# Altium PCB isolated TTL_to_485.PcbDoc
Units mm, origin at the board's own origin, x right, y up, seen from the top; angles counter-clockwise.
Board outline 50 x 30 mm, 2 copper layers (Top Layer, Bottom Layer); 21 components, 16 nets, 66 pads, 0 vias.
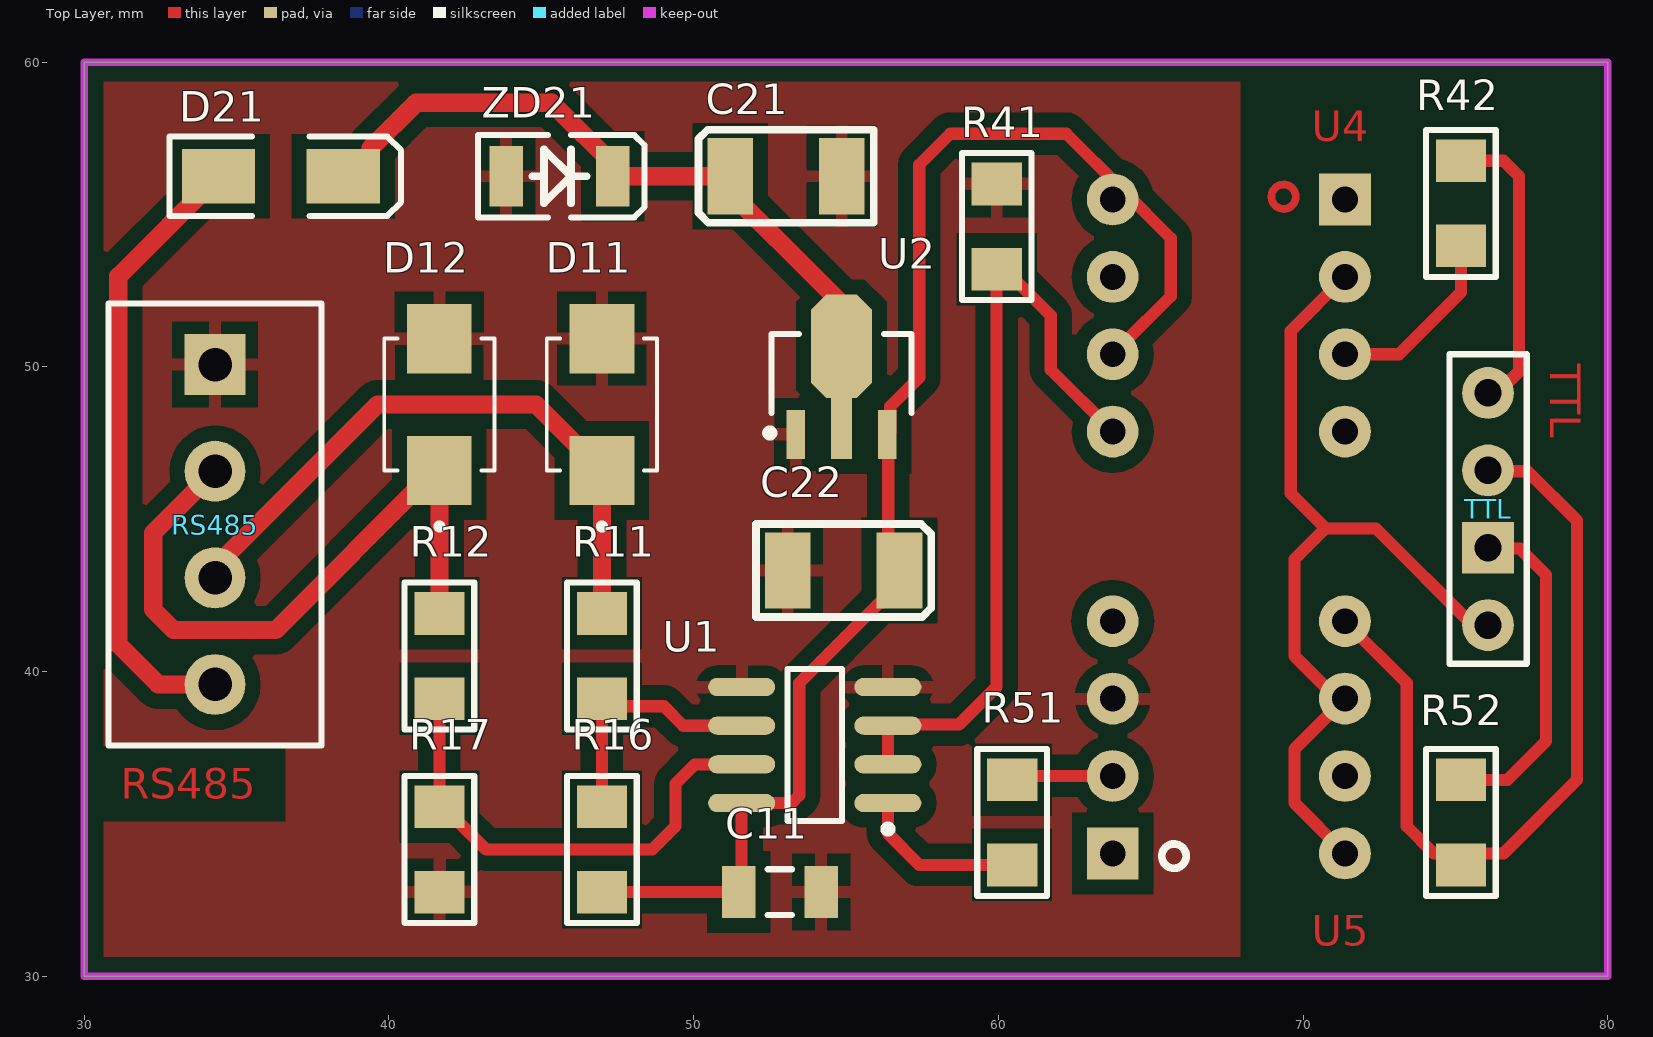
[diagram p0: Top Layer view]
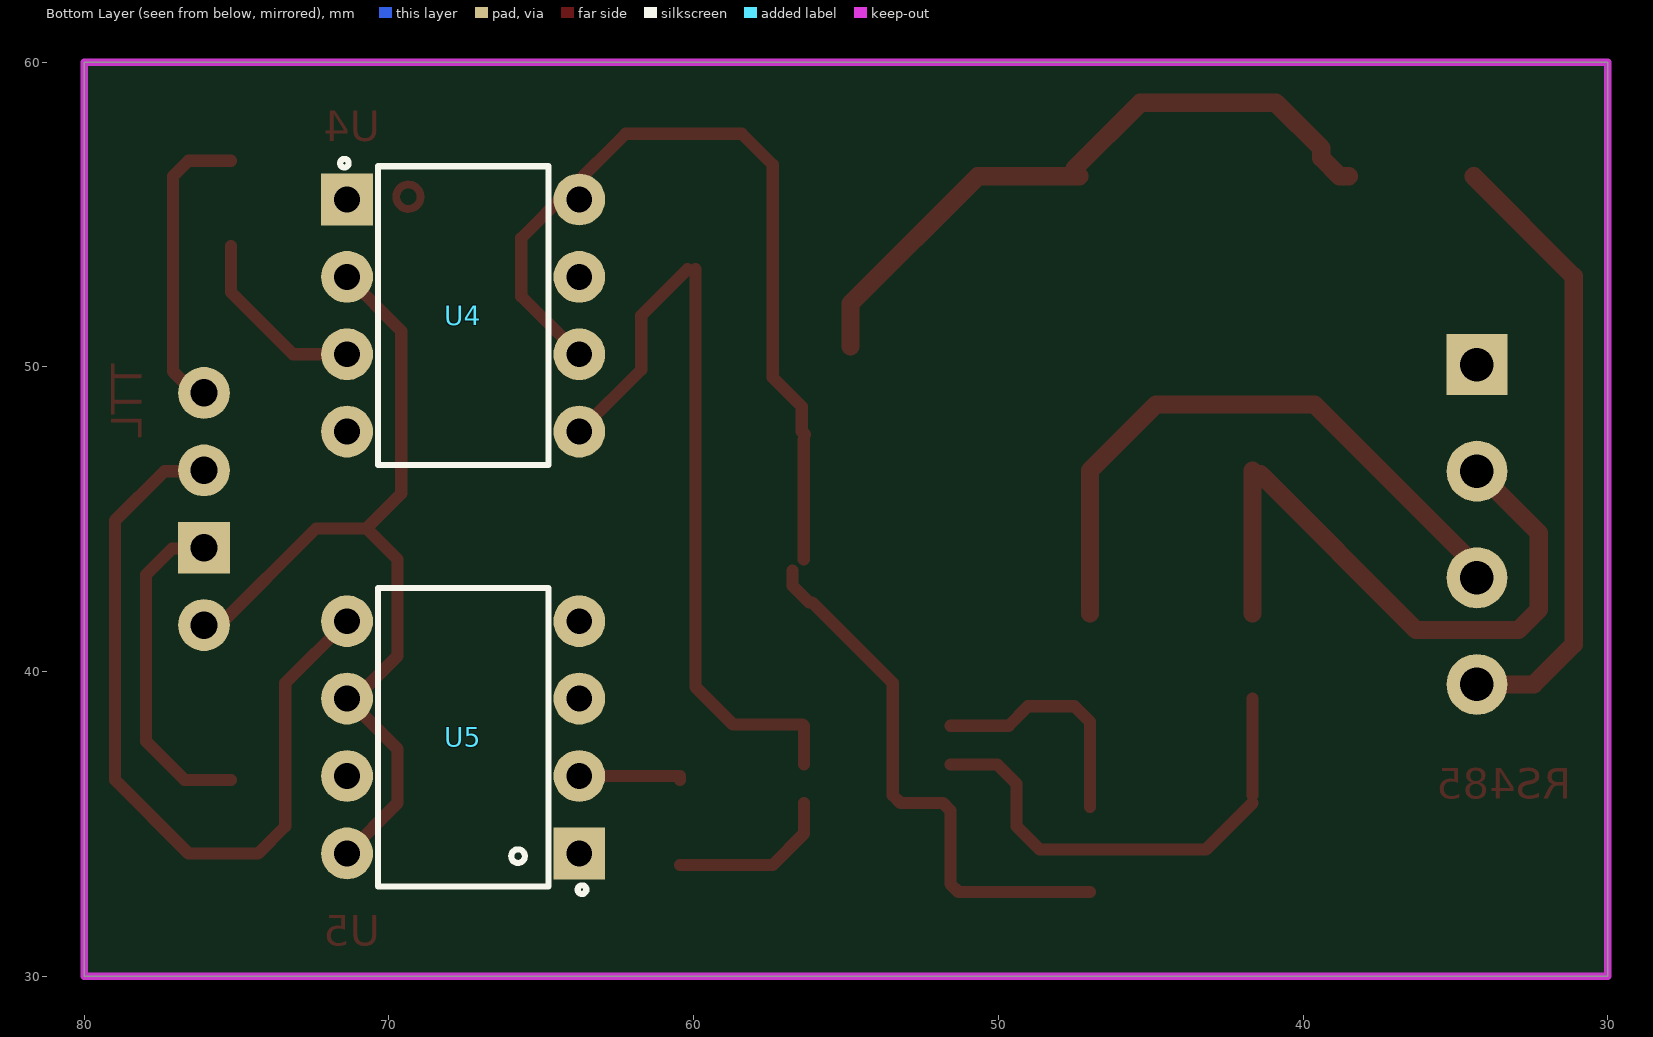
[diagram p1: Bottom Layer view, seen from below]
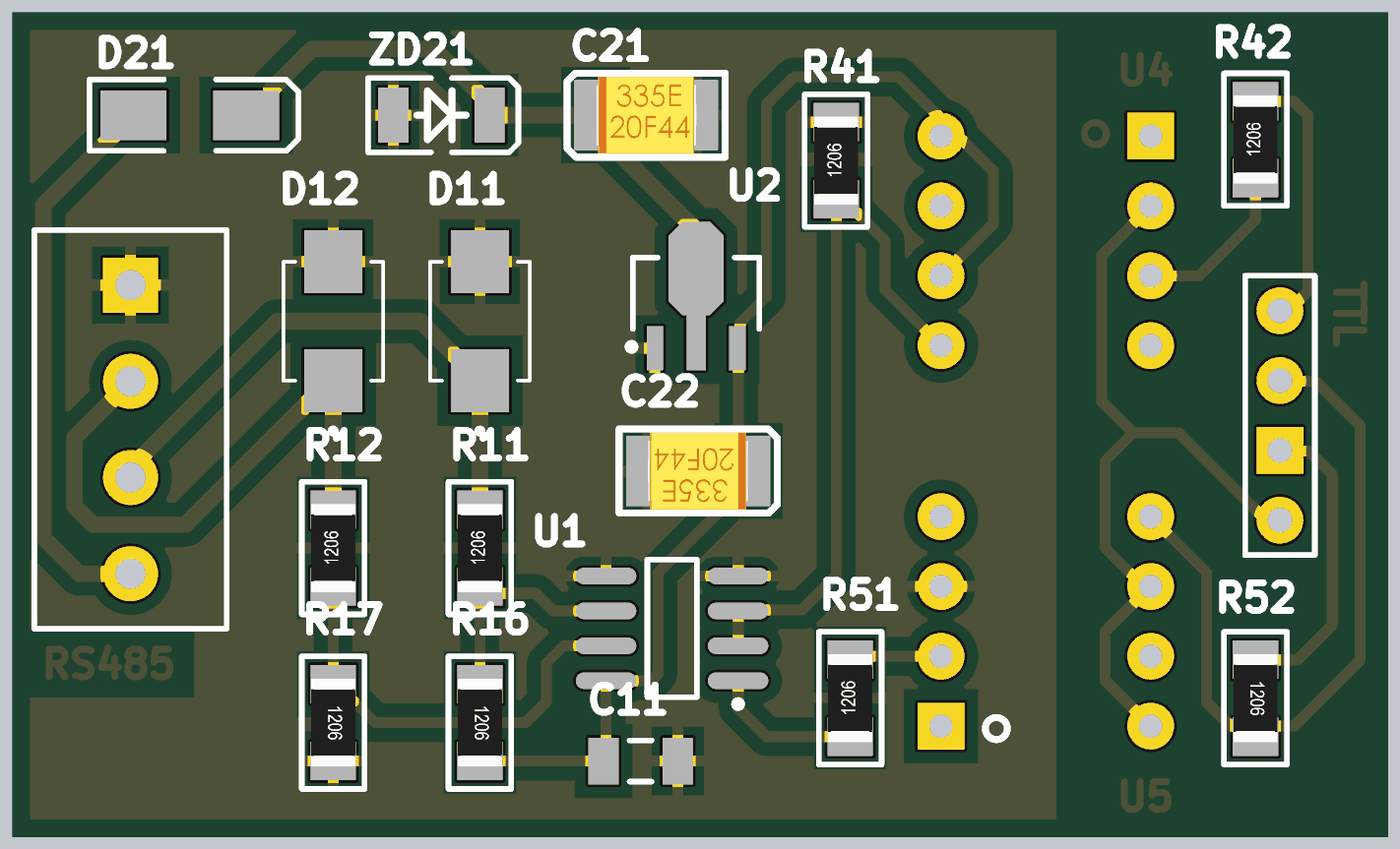
[diagram p2: 3D render of the assembled board from above, using the file's embedded part models]

## Layer stack, top to bottom
Top Solder: solder mask 0.0102, Solder Resist, Dk 3.5
Top Layer: signal copper 0.0356
Dielectric 1: dielectric 0.32, FR-4, Dk 4.8
Bottom Layer: signal copper 0.0356
Bottom Solder: solder mask 0.0102, Solder Resist, Dk 3.5

## Board outline
30,30 80,30 80,60 30,60

## Design rules (kind name [scope] priority, off if disabled: settings)
Clearance [All] p1: gap=0.4 ignorepadtopadclearanceinfootprint=FALSE
PolygonConnect [All] p1: connectstyle=Relief reliefconductorwidth=0.4 reliefentries=4 polygonreliefangle="90 Angle" airgapwidth=0.4
RoutingVias [All] p1: holewidth=0.711 width=1.27 viastyle="Through Hole" minholewidth=0.711 minwidth=1.27 maxholewidth=0.711 maxwidth=1.27
SolderMaskExpansion [All] p1: expansion=0.102 istentingtop=FALSE
Width [All] p1: maxlimit=1 minlimit=0.254 preferedwidth=0.254 minimp=50.000000 maximp=50.000000 favimp=50.000000
30 further rules are at their usual default settings.

## Components (designator, comment, footprint, x,y, rotation, side; value= is the part's Value field where it differs from the comment)
C11 "Cap" C1206 52.832,32.766 r0 top value=100nF
C21 "106E" "Tantalium CASE B" 53.033,56.261 r0 top value=10uF
C22 "106C" "Tantalium CASE B" 54.924,43.318 r180 top value=10uF
D11 "SMBJ12A" DIOM4336X265N 46.99,48.768 r90 top
D12 "SMBJ12A" DIOM4336X265N 41.656,48.768 r90 top
D21 "1N4007" SMA 36.449,56.261 r0 top
R11 "Res" "1206 Resistor" 46.99,40.513 r90 top value=10
R12 "Res" "1206 Resistor" 41.656,40.513 r90 top value=10
R16 "Res" "1206 Resistor" 46.99,34.163 r270 top value=10K
R17 "Res" "1206 Resistor" 41.656,34.163 r270 top value=10K
R41 "Res" "1206 Resistor" 59.944,54.61 r90 top value=1K
R42 "Res" "1206 Resistor" 75.184,55.372 r90 top value=470
R51 "Res" "1206 Resistor" 60.452,35.052 r90 top value=470
R52 "Res" "1206 Resistor" 75.184,35.052 r270 top value=1K
RS485 "Header 4" HDR1X4#1 34.29,41.5 r90 top
TTL "Header 4" HDR1X4#2 76.073,41.529 r90 top
U1 "MAX485CSA" NSO8_N 53.975,37.592 r180 top
U2 "HT7550" SOT-89_M 54.85,49.784 r90 top
U4 "6N136M" DIP762W50P254L977H451Q8#1 67.564,51.689 r180 bottom
U5 "6N136M" DIP762W50P254L977H451Q8#2 67.564,37.846 r0 bottom
ZD21 "Diode Zener" "Mini MELF" 45.593,56.261 r0 top value=18v

## Footprints (in the part's own frame and the unit in brackets; to place one, negate y for a bottom-side part, rotate by r counter-clockwise, add the part's x,y. Pads: shape width x height; smd on the part's side, far side on the other; paste and mask are expansions set on the pad)
"1206 Resistor" [mil]
  rect 55x65 smd: 1(-55,0) 2(55,0)
  silkscreen extent -95,-45 95,45, body extent -63,-31 63,31, height 24
C1206 [mm] "Chip Capacitor, Body 3.2x1.6mm, IPC High Density"
  rect 1.1x1.7 smd: 1(-1.35,0) 2(1.35,0)
  silkscreen extent -0.4,-0.75 0.4,0.75, body extent -1.7,-0.9 1.7,0.9, height 1.3
DIOM4336X265N [mm]
  rect 2.28x2.12 smd: A(2.165,0) C(-2.165,0)
  silkscreen extent -4.1,-1.81 2.16,1.81
DIP762W50P254L977H451Q8#1 [mm]
  rect 1.7x1.7 hole 0.85: 1(-3.81,3.81)
  round 1.7 hole 0.85: 2(-3.81,1.27) 3(-3.81,-1.27) 4(-3.81,-3.81) 5(3.81,-3.81) 6(3.81,-1.27) 7(3.81,1.27) 8(3.81,3.81)
  Bottom Layer circle w0.254: c-1.8,3.9 r0.4
  silkscreen extent -4.04,-4.9 2.8,5.14
DIP762W50P254L977H451Q8#2 [mm]
  rect 1.7x1.7 hole 0.85: 1(-3.81,3.81)
  round 1.7 hole 0.85: 2(-3.81,1.27) 3(-3.81,-1.27) 4(-3.81,-3.81) 5(3.81,-3.81) 6(3.81,-1.27) 7(3.81,1.27) 8(3.81,3.81)
  silkscreen extent -4.04,-4.9 2.8,5.14
HDR1X4#1 [mm] "Connector; Header; 4 Position"
  round 2 hole 1.1: 1(-1.92,0) 2(1.58,0) 3(5.08,0)
  rect 2x2 hole 1.1: 4(8.58,0)
  silkscreen extent -3.92,-3.5 10.58,3.5
HDR1X4#2 [mm] "Connector; Header; 4 Position"
  round 1.7 hole 0.9: 1(0,0) 3(5.08,0) 4(7.62,0)
  rect 1.7x1.7 hole 0.9: 2(2.54,0)
  silkscreen extent -1.27,-1.27 8.89,1.27
"Mini MELF" [mm] "Mini MELF; 3.5mm*1.45mm"
  rect 1.1x2 smd: 1(-1.75,0) 2(1.75,0)
  silkscreen extent -2.67,-1.35 2.79,1.35
NSO8_N [mm] "SOIC, 8-Leads, Body 4.9x3.9mm, Pitch 1.27mm, IPC Medium Density"
  oval 2.2x0.6 smd: 1(-2.4,1.905) 2(-2.4,0.635) 3(-2.4,-0.635) 4(-2.4,-1.905) 5(2.4,-1.905) 6(2.4,-0.635) 7(2.4,0.635) 8(2.4,1.905)
  silkscreen extent -2.53,-2.5 0.9,2.88, body extent -2,-2.5 2,2.5, height 1.75
SMA [mm] "DO-214-AC/SMA; 2 C-Bend Leads; Body 5 x 2.7 mm, inc. leads (LxW)"
  rect 2.4x1.8 smd: 1(-2.05,0) 2(2.05,0)
  silkscreen extent -3.65,-1.3 3.95,1.3
SOT-89_M [mm] "SOT89, 3-Leads, Body 4.5x2.4 mm, Pitch 1.5mm, Lead Span 4.1mm, IPC Low Density"
  rect 1.6x0.6 smd: 1(-2,1.5) 3(-2,-1.5)
  rect 2x0.7 smd: 2(-1.8,0)
  oct 3.4x2 smd: 2(0.9,0)
  silkscreen extent -2.07,-2.3 1.3,2.47, body extent -1.3,-2.3 1.3,2.3, height 1.6
"Tantalium CASE B" [mm]
  rect 1.5x2.5 smd paste+0.038 mask+0.038: 1(-1.831,0) 2(1.832,0)
  silkscreen extent -2.88,-1.53 2.88,1.53, body extent -1.83,-1.4 1.83,1.4, height 1.95

## Part data
C11: "Capacitor"
C21 C22: library part "Cap Pol2", "Polarized Capacitor Tantalium"
D11 D12: "15.6V Clamp 17.5A Ipp Tvs Diode Surface Mount DO-214AA (SMB)", Package="SMB-2 Fairchild Semiconductor", Availability="In Stock", Check_prices=https://www.snapeda.com/parts/SMBJ12A/Onsemi/view-part/?ref=eda, MF="ON Semiconductor", MP=SMBJ12A, Price=None, Purchase-URL=https://pricing.snapeda.com/search/part/SMBJ12A/?ref=eda, SnapEDA_Link=https://www.snapeda.com/parts/SMBJ12A/Onsemi/view-part/?ref=snap
D21: library part Diode, "Default Diode", Code_JEDEC=DO-214-AB, LatestRevisionDate=17-Jul-2002, LatestRevisionNote="Re-released for DXP Platform.", PackageDescription="DO-214-AB/SMC; 2 C-Bend Leads; Body 7.9 x 5.9 mm, inc. leads (LxW)", PackageReference=SMC, PackageVersion=Sep-1996, Published=8-Jun-2000, Publisher="Altium Limited"
R11 R12 R16 R17 R41 R42 R51 R52: "Resistor", PackageDescription="Chip Resistor"
RS485 TTL: "Header, 4-Pin", LatestRevisionDate=17-Jul-2002, LatestRevisionNote="Re-released for DXP Platform.", Publisher="Altium Limited"
U1: "Low-Power, Slew-Rate-Limited RS-485/RS-422 Transceiver", Code_IPC=SOIC127P600-8, Code_JEDEC=MS-012-AA, ComponentLink1Description="Manufacturer Link", ComponentLink1URL=http://www.maxim-ic.com/, ComponentLink2Description=Datasheet, ComponentLink2URL=http://pdfserv.maxim-ic.com/en/ds/MAX1487-MAX491.pdf, DatasheetVersion=Feb-1996, LatestRevisionDate=13-Apr-2006, LatestRevisionNote="IPC-7351 Footprint Added.", PackageDescription="8-Pin Small Outline Integrated Circuit 1.27 mm Pitch", PackageReference=NSO8, Published=16-Jan-2001, Publisher="Altium Limited"
U2: library part L78L33ABUTR, "Positive Voltage Regulator, 3.3V, 4-Pin SOT-89, Tape and Reel", ComponentLink1Description="Manufacturer URL", ComponentLink1URL=http://www.st.com, ComponentLink2Description=Datasheet, ComponentLink2URL=http://www.st.com/internet/com/TECHNICAL_RESOURCES/TECHNICAL_LITERATURE/DATASHEET/CD00000446.pdf, DatasheetVersion=Feb-2011, PackageDescription="3-Pin SOT-89 Package 1.5 mm Pitch, 4.1 mm Lead Span", PackageReference=SOT-89, PackageVersion=2011, PartNumber=L78L33ABUTR
U4 U5: "High Speed Optocoupler, 1 MBd, Photodiode with Transistor Output", Package=None, Availability=Unavailable, MP=6N136M, Price=None
ZD21: "Zener Diode", PackageDescription="Zener Diode"

## Nets (pads, with @x,y where several pads share a name; then routed paths per layer and width w, separated by ;. In a path a pad name is that pad's centre, name@x,y a point inside that pad or via, vN(x,y) a via of type N, cw(c..) or ccw(c..) an arc to the next point about the centre after c; other vN are vias at no path point)
A: D11.C R11.2 RS485.2 | length 20.9
  Top Layer w0.6: RS485.2 34.29,43.434 39.624,48.768 44.825,48.768 D11.C R11.2
B: D12.C R12.2 RS485.3 | length 21.6
  Top Layer w0.6: RS485.3 32.258,44.548 32.258,42.037 32.93,41.365 36.285,41.365 D12.C@41.402,46.482 ; R12.2 41.656,46.228 D12.C
GND: C11.2 C21.2 C22.2 D11.A D12.A R17.2 R41.2 RS485.4 U1.4 U1.5 U2.1 U5.3 ZD21.1
GND_TTL: R52.1 TTL.2 | length 10.7
  Top Layer w0.4: R52.1 76.708,36.449 77.978,37.719 77.978,43.18 77.118,44.04 TTL.2@76.454,44.04
NetC21_1: C21.1 D21.2 U2.2 ZD21.2 | length 21.7
  Top Layer w0.6: D21.2 38.799,56.261 39.399,56.861 39.399,57.179 40.894,58.674 45.339,58.674 ZD21.2@47.498,56.515 ; ZD21.2 50.673,56.261 54.85,52.084 U2.2@54.85,50.684
NetR11_1: R11.1 R16.1 U1.6 | length 7.9
  Top Layer w0.4: R16.1 46.99,38.354 47.498,38.862 49.022,38.862 49.657,38.227 U1.6
NetR12_1: R12.1 R17.1 U1.7 | length 15.7
  Top Layer w0.4: R17.1@41.656,35.687 42.281,35.061 43.18,34.163 48.641,34.163 49.403,34.925 49.403,36.322 50.038,36.957 U1.7 ; R17.1@41.656,35.941 R12.1
NetR41_1: R41.1 U1.2 U1.3 U4.5 | length 25.9
  Top Layer w0.4: U1.2 56.375,38.214 56.426,38.265 58.712,38.265 59.944,39.497 R41.1 ; R41.1@60.198,53.213 61.722,51.689 61.722,49.911 U4.5
NetR42_1: R42.1 U4.3 | length 6.2
  Top Layer w0.4: U4.3 73.152,50.419 75.184,52.451 R42.1
NetR51_1: R51.1 U1.1 | length 5.5
  Top Layer w0.4: U1.1 56.375,34.684 57.404,33.655 R51.1
NetR51_2: R51.2 U5.2 | length 3.4
  Top Layer w0.4: R51.2 60.452,36.576 U5.2
RX: R52.2 TTL.3 U5.5 | length 26.2
  Top Layer w0.4: U5.5 73.406,39.624 73.406,34.925 74.295,34.036 76.581,34.036 78.994,36.449 78.994,44.958 77.372,46.58 TTL.3@76.454,46.58
TX: R42.2 TTL.4 | length 9.5
  Top Layer w0.4: R42.2 76.581,56.769 77.089,56.261 77.089,49.852 76.425,49.188 TTL.4@76.425,49.12
VBUS+: D21.1 RS485.1 | length 20.4
  Top Layer w0.6: RS485.1 32.429,39.58 31.115,40.894 31.115,52.977 D21.1
VCC: C11.1 C22.1 R16.2 U1.8 U2.3 U4.6 U4.8 | length 46.4
  Top Layer w0.4: R16.2 51.308,32.766 51.575,33.033 51.575,35.446 51.816,35.687 53.213,35.687 53.467,35.941 53.467,39.624 56.111,42.268 56.205,42.268 56.755,42.818 C22.1 ; U2.3 56.45,47.884 56.45,48.703 57.404,49.657 57.404,56.642 58.42,57.658 62.23,57.658 64.071,55.817 65.659,54.229 65.659,52.324 64.135,50.8 U4.6@64.135,50.165 ; C22.1@56.388,43.688 U2.3@56.388,47.625 ; U4.8 U4.8@64.003,55.25
VCC_TTL: TTL.1 U4.2 U5.6 U5.8 | length 29.6
  Top Layer w0.4: U5.6@71.247,38.989 69.723,37.465 69.723,35.687 U5.8 ; U5.6 71.12,39.116 69.723,40.513 69.723,43.688 70.739,44.704 ; U4.2 69.596,51.181 69.596,45.847 70.739,44.704 ; TTL.1@76.454,41.5 76.073,41.5 75.594,41.5 72.39,44.704 70.739,44.704
pads on no net: U4.1 U4.4 U4.7 U5.1 U5.4 U5.7

## Polygon pours and split planes (outlines as drawn)
GND on Top Layer "GND_L01_P000" (solid, pour order 0): 30,60 30,30 67.917,30 67.945,29.972 67.945,60.071

## Keep-outs
Keep-Out Layer:
  the board outline again, w0.254